# EAGLE board dashboard (EAGLE 6.3)
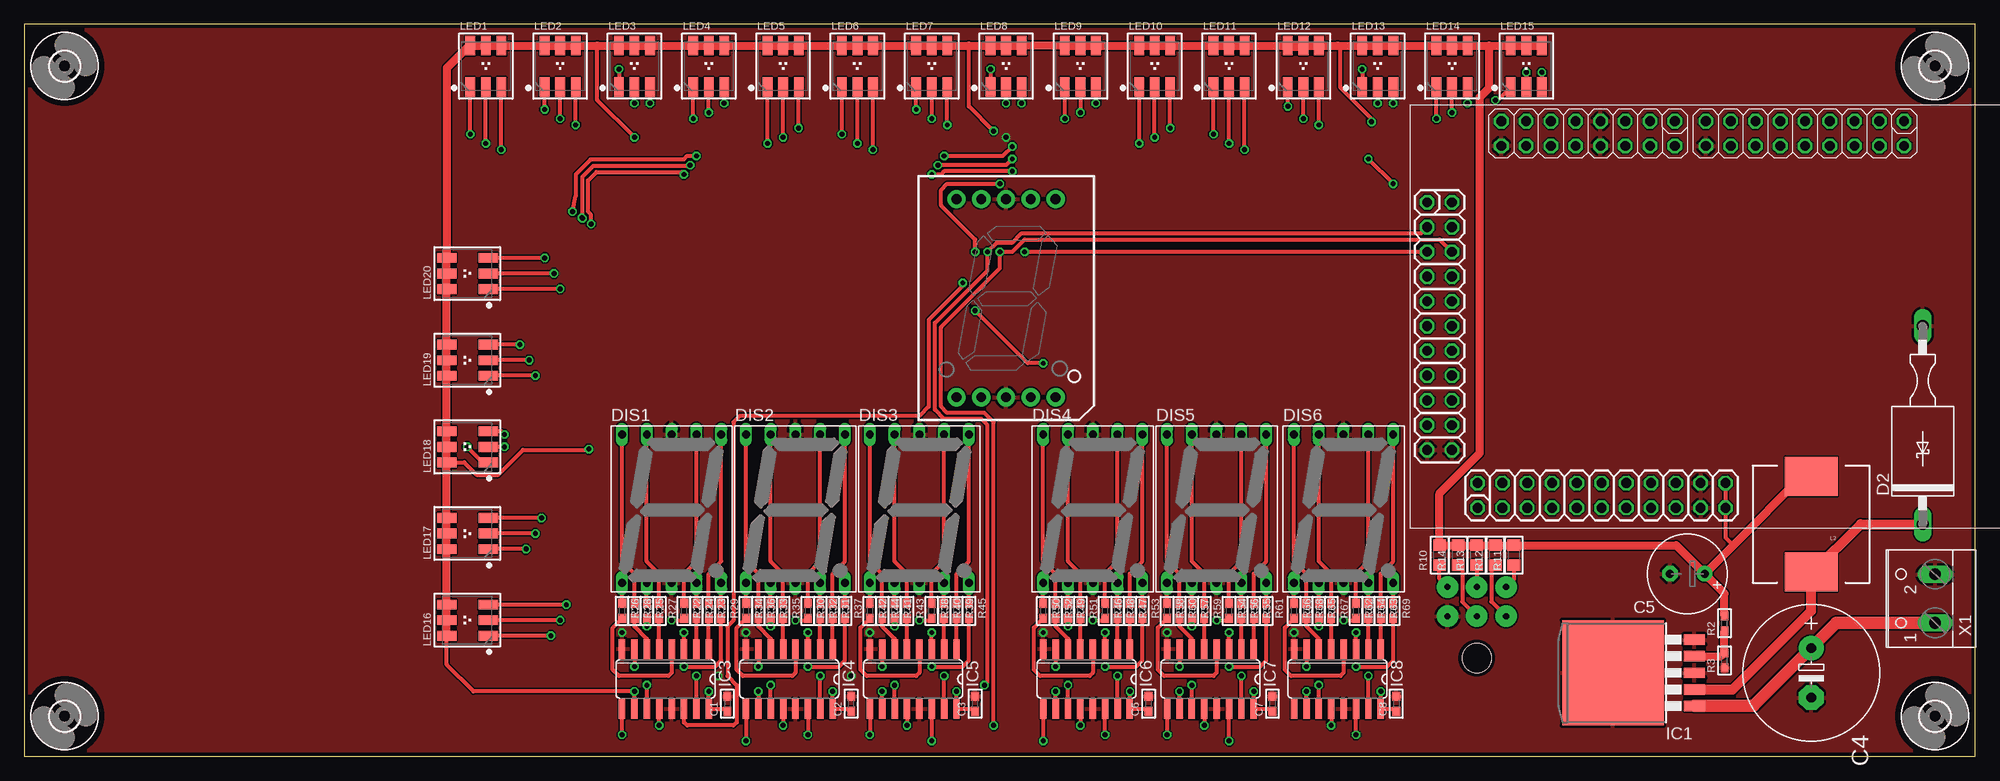
[diagram p0: board, top side]
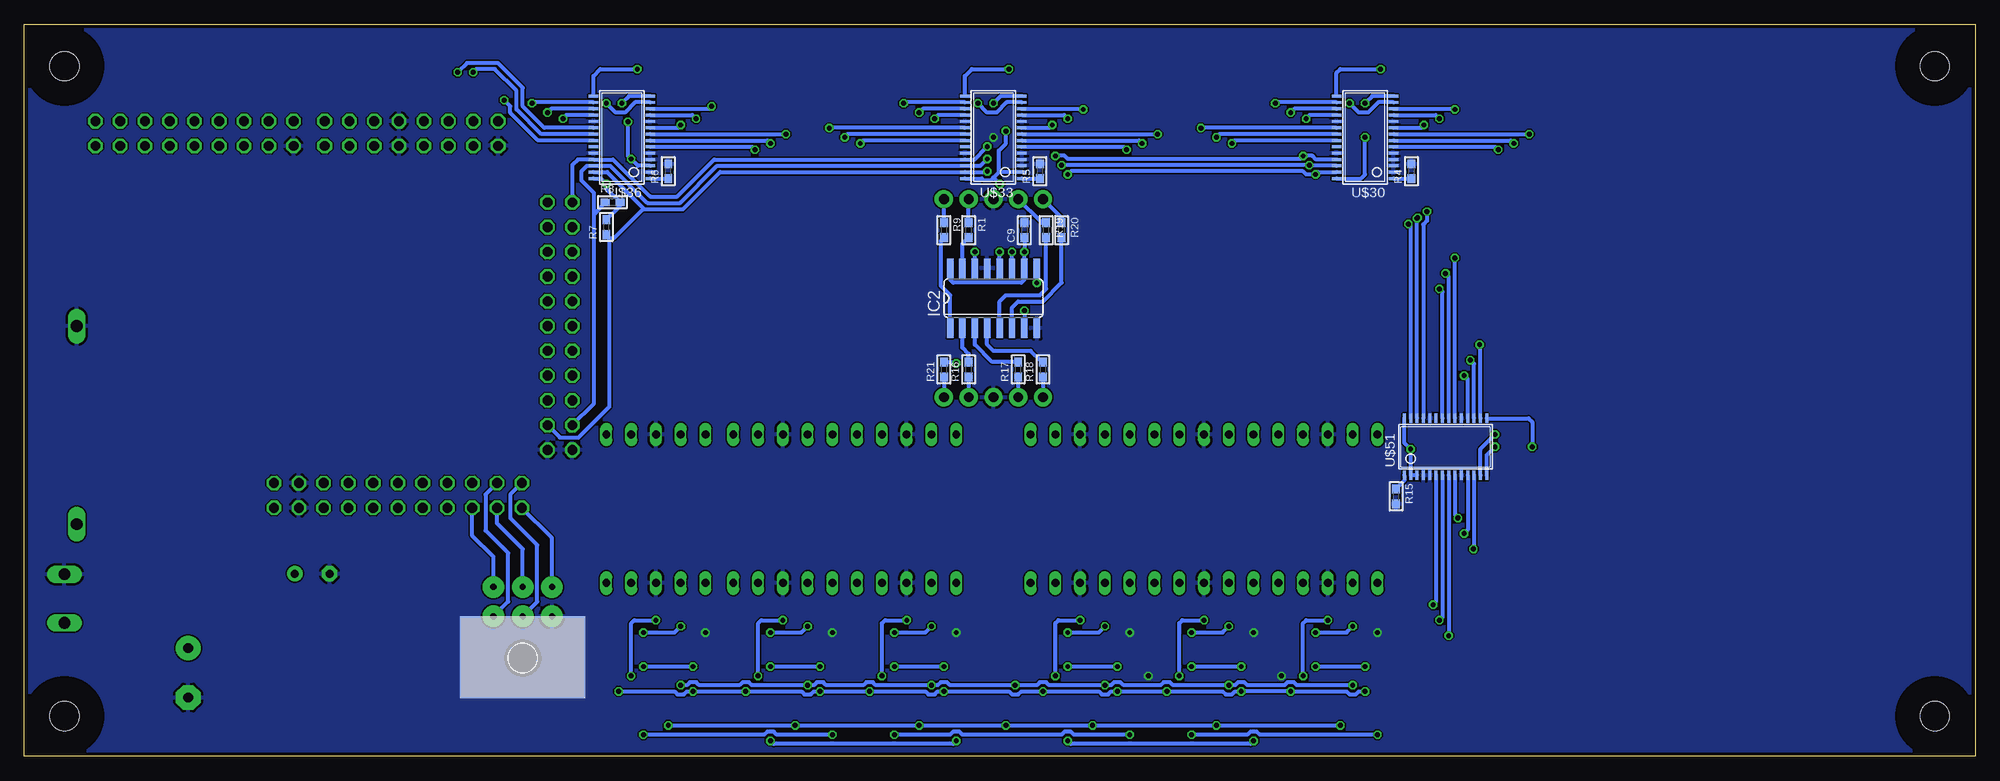
[diagram p1: board, bottom side, seen from below]

Size 200 x 75.08 mm. Coordinates in mm from the lower left corner, seen from the top.
Outline: 0,0 200,0 200,75.08 0,75.08 0,0
Copper layers (1*16): Top 0.0356mm / dielectric 1.5011mm / Bottom 0.0356mm
Design rules "LaenPCBOrder": minimum track width 6mil, minimum drill 13mil, track to track 6mil, track to pad 6mil, pad to pad 6mil, via to via 6mil, smd to smd 6mil, copper to edge 15mil, drill to drill 6mil, minimum pad ring 7mil, minimum via ring 7mil, stop-mask expansion 3mil, vias tented up to drill 0mil, thermal gap 10mil

## Footprints (pad centres in the part's own frame; a part is rotated, then mirrored left to right if it is on the bottom)
_0603 = smd 0.9 x 0.8: 1 -0.762,0; 2 0.762,0
E5-13 = drill 1.016 pad 2.54: + -2.54,0 | drill 1.016 pad 2.54 octagon: - 2.54,0
E3,5-8 = drill 0.813 pad 1.6: + -1.778,0 | drill 0.813 pad 1.6 octagon: - 1.778,0
DO13M = drill 1.194 long: A 10.16,0; C -10.16,0
HDSP-M = drill 0.813 long: 1 -5.08,-7.62; 2 -2.54,-7.62; 3 0,-7.62; 4 2.54,-7.62; 5 5.08,-7.62; 6 5.08,7.62; 7 2.54,7.62; 8 0,7.62; 9 -2.54,7.62; 10 -5.08,7.62
3,0 = hole 3: 0,0
TO263-5 = smd 1.067 x 2.159: 1 -3.404,-5.791; 2 -1.702,-5.791; 3 0,-5.791; 4 1.702,-5.791; 5 3.404,-5.791 | smd 10.8 x 10.41: 6 0,2.54
SO16 = smd 0.66 x 2.032: 1 -4.445,-3.073; 2 -3.175,-3.073; 3 -1.905,-3.073; 4 -0.635,-3.073; 5 0.635,-3.073; 6 1.905,-3.073; 7 3.175,-3.073; 8 4.445,-3.073; 9 4.445,3.073; 10 3.175,3.073; 11 1.905,3.073; 12 0.635,3.073; 13 -0.635,3.073; 14 -1.905,3.073; 15 -3.175,3.073; 16 -4.445,3.073
CDRH125 = smd 5.4 x 4: 1 0,4.9; 2 0,-4.9
RGBLED_PLCC6 = smd 1 x 2: 1 -1.6,-2.158; 2 0,-2.158; 3 1.6,-2.158; 4 1.6,2.108; 5 0,2.108; 6 -1.6,2.108
_0805 = smd 1.2 x 1.3: 1 -1.016,0; 2 1.016,0
CPU-BOARD-JP1 = drill 1 octagon: P$1 1.27,-12.7; P$2 -1.27,-12.7; P$3 1.27,-10.16; P$4 -1.27,-10.16; P$5 1.27,-7.62; P$6 -1.27,-7.62; P$7 1.27,-5.08; P$8 -1.27,-5.08; P$9 1.27,-2.54; P$10 -1.27,-2.54; P$11 1.27,0; P$12 -1.27,0; P$13 1.27,2.54; P$14 -1.27,2.54; P$15 1.27,5.08; P$16 -1.27,5.08; P$17 1.27,7.62; P$18 -1.27,7.62; P$19 1.27,10.16; P$20 -1.27,10.16; P$21 1.27,12.7; P$22 -1.27,12.7; P$23 -3.905,18.637; P$24 -3.905,16.097; P$25 -6.445,18.637; P$26 -6.445,16.097; P$27 -8.985,18.637; P$28 -8.985,16.097; P$29 -11.525,18.637; P$30 -11.525,16.097; P$31 -14.065,18.637; P$32 -14.065,16.097; P$33 -16.605,18.637; P$34 -16.605,16.097; P$35 -19.145,18.637; P$36 -19.145,16.097; P$37 -21.685,18.637; P$38 -21.685,16.097; P$39 -24.225,18.637; P$40 -24.225,16.097; P$41 -26.765,18.637; P$42 -26.765,16.097; P$43 -29.305,18.637; P$44 -29.305,16.097; P$45 -47.625,-21.018; P$46 -47.625,-18.479; P$47 -45.085,-21.018; P$48 -45.085,-18.479; P$49 -42.545,-21.018; P$50 -42.545,-18.479; P$51 -40.005,-21.018; P$52 -40.005,-18.479; P$53 -37.465,-21.018; P$54 -37.465,-18.479; P$55 -34.925,-21.018; P$56 -34.925,-18.479; P$57 -32.385,-21.018; P$58 -32.385,-18.479; P$59 -29.845,-21.018; P$60 -29.845,-18.479; P$61 -27.305,-21.018; P$62 -27.305,-18.479; P$63 -24.115,-21.024; P$64 -24.115,-18.484; P$65 -21.575,-21.024; P$66 -21.575,-18.484; P$67 -19.035,-21.024; P$68 -19.035,-18.484; P$69 -16.495,-21.024; P$70 -16.495,-18.484; P$71 -13.955,-21.024; P$72 -13.955,-18.484; P$73 -11.415,-21.024; P$74 -11.415,-18.484; P$75 -8.875,-21.024; P$76 -8.875,-18.484; P$77 -6.335,-21.024; P$78 -6.335,-18.484
7-SEGMENT-1"PTH = drill 1 pad 1.88: 1 -5.08,-10.16; 2 -2.54,-10.16; 3 0,-10.16; 4 2.54,-10.16; 5 5.08,-10.16; 6 5.08,10.16; 7 2.54,10.16; 8 0,10.16; 9 -2.54,10.16; 10 -5.08,10.16
TSSOP28 = smd 0.305 x 0.991: 1 -4.225,-2.918; 2 -3.575,-2.918; 3 -2.925,-2.918; 4 -2.275,-2.918; 5 -1.625,-2.918; 6 -0.975,-2.918; 7 -0.325,-2.918; 8 0.325,-2.918; 9 0.975,-2.918; 10 1.625,-2.918; 11 2.275,-2.918; 12 2.925,-2.918; 13 3.575,-2.918; 14 4.225,-2.918; 15 4.225,2.918; 16 3.575,2.918; 17 2.925,2.918; 18 2.275,2.918; 19 1.625,2.918; 20 0.975,2.918; 21 0.325,2.918; 22 -0.325,2.918; 23 -0.975,2.918; 24 -1.625,2.918; 25 -2.275,2.918; 26 -2.925,2.918; 27 -3.575,2.918; 28 -4.225,2.918
MICROFIT6SOCK = drill 0.64 pad 2.184: PIN1 3,-1.5; PIN2 3,1.5; PIN3 0,-1.5; PIN4 0,1.5; PIN5 -3,-1.5; PIN6 -3,1.5 | hole 3: 0,-5.8
W237-102 = drill 1.194 long: 1 -2.5,-1.27; 2 2.5,-1.27

## Placement (x,y rotation side)
C1  100n  [_0603]  72.07,5.4 90 top
C2  100n  [_0603]  84.77,5.4 90 top
C3  100n  [_0603]  97.47,5.4 90 top
C4  470u 50V  [E5-13]  183.2,8.57 270 top
C5  220u 35V  [E3,5-8]  170.5,18.73 180 top
C6  100n  [_0603]  115.25,5.4 90 top
C7  100n  [_0603]  127.95,5.4 90 top
C8  100n  [_0603]  140.65,5.4 90 top
C9  100n  [_0603]  97.47,53.98 90 bottom
D2  1N5638  [DO13M]  194.63,33.97 90 top
DIS1  HD-H103  [HDSP-M]  66.36,25.4 0 top
DIS2  HD-H103  [HDSP-M]  79.06,25.4 0 top
DIS3  HD-H103  [HDSP-M]  91.76,25.4 0 top
DIS4  HD-H103  [HDSP-M]  109.54,25.4 0 top
DIS5  HD-H103  [HDSP-M]  122.24,25.4 0 top
DIS6  HD-H103  [HDSP-M]  135.25,25.4 0 top
H1  MOUNT-HOLE3.0  [3,0]  4.13,4.13 0 top
H2  MOUNT-HOLE3.0  [3,0]  195.9,4.13 0 top
H3  MOUNT-HOLE3.0  [3,0]  195.9,70.8 0 top
H4  MOUNT-HOLE3.0  [3,0]  4.13,70.8 0 top
IC1  [TO263-5]  165.42,8.57 90 top
IC2  74HC595D  [SO16]  100.65,46.99 0 bottom
IC3  74HC595D  [SO16]  65.72,7.94 180 top
IC4  74HC595D  [SO16]  78.42,7.94 180 top
IC5  74HC595D  [SO16]  91.12,7.94 180 top
IC6  74HC595D  [SO16]  108.9,7.94 180 top
IC7  74HC595D  [SO16]  121.6,7.94 180 top
IC8  74HC595D  [SO16]  134.62,7.94 180 top
L2  MSS1583-683MED  [CDRH125]  183.2,23.81 180 top
LED1  [RGBLED_PLCC6]  47.31,70.8 0 top
LED2  [RGBLED_PLCC6]  54.93,70.8 0 top
LED3  [RGBLED_PLCC6]  62.55,70.8 0 top
LED4  [RGBLED_PLCC6]  70.17,70.8 0 top
LED5  [RGBLED_PLCC6]  77.79,70.8 0 top
LED6  [RGBLED_PLCC6]  85.41,70.8 0 top
LED7  [RGBLED_PLCC6]  93.03,70.8 0 top
LED8  [RGBLED_PLCC6]  100.65,70.8 0 top
LED9  [RGBLED_PLCC6]  108.27,70.8 0 top
LED10  [RGBLED_PLCC6]  115.89,70.8 0 top
LED11  [RGBLED_PLCC6]  123.51,70.8 0 top
LED12  [RGBLED_PLCC6]  131.13,70.8 0 top
LED13  [RGBLED_PLCC6]  138.75,70.8 0 top
LED14  [RGBLED_PLCC6]  146.37,70.8 0 top
LED15  [RGBLED_PLCC6]  153.99,70.8 0 top
LED16  [RGBLED_PLCC6]  45.4,13.97 90 top
LED17  [RGBLED_PLCC6]  45.4,22.86 90 top
LED18  [RGBLED_PLCC6]  45.4,31.75 90 top
LED19  [RGBLED_PLCC6]  45.4,40.64 90 top
LED20  [RGBLED_PLCC6]  45.4,49.53 90 top
R1  4R7  [_0603]  103.19,53.98 270 bottom
R2  1k69  [_0603]  174.31,13.65 90 top
R3  1k  [_0603]  174.31,9.84 90 top
R4  931  [_0603]  57.79,60.01 90 bottom
R5  931  [_0603]  95.88,60.01 90 bottom
R6  931  [_0603]  133.98,60.01 90 bottom
R7  500  [_0603]  140.34,54.29 90 bottom
R8  500  [_0603]  139.7,56.83 0 bottom
R9  4R7  [_0603]  105.73,53.98 270 bottom
R10  500  [_0805]  145.1,20.64 90 top
R11  500  [_0805]  152.72,20.64 90 top
R12  500  [_0805]  150.81,20.64 90 top
R13  500  [_0805]  148.91,20.64 90 top
R14  500  [_0805]  147,20.64 90 top
R15  931  [_0603]  59.37,26.67 270 bottom
R16  4R7  [_0603]  103.19,39.69 90 bottom
R17  4R7  [_0603]  98.11,39.69 90 bottom
R18  4R7  [_0603]  95.57,39.69 90 bottom
R19  4R7  [_0603]  95.25,53.98 270 bottom
R20  4R7  [_0603]  93.66,53.98 270 bottom
R21  4R7  [_0603]  105.73,39.69 90 bottom
R22  4R7  [_0603]  67.63,14.92 270 top
R23  4R7  [_0603]  70.17,14.92 270 top
R24  4R7  [_0603]  68.9,14.92 270 top
R25  4R7  [_0603]  63.82,14.92 270 top
R26  4R7  [_0603]  61.28,14.92 270 top
R27  4R7  [_0603]  65.09,14.92 270 top
R28  4R7  [_0603]  62.55,14.92 270 top
R29  4R7  [_0603]  71.44,14.92 270 top
R30  4R7  [_0603]  80.33,14.92 270 top
R31  4R7  [_0603]  82.87,14.92 270 top
R32  4R7  [_0603]  81.6,14.92 270 top
R33  4R7  [_0603]  76.52,14.92 270 top
R34  4R7  [_0603]  73.98,14.92 270 top
R35  4R7  [_0603]  77.79,14.92 270 top
R36  4R7  [_0603]  75.25,14.92 270 top
R37  4R7  [_0603]  84.14,14.92 270 top
R38  4R7  [_0603]  93.03,14.92 270 top
R39  4R7  [_0603]  95.57,14.92 270 top
R40  4R7  [_0603]  94.3,14.92 270 top
R41  4R7  [_0603]  89.22,14.92 270 top
R42  4R7  [_0603]  86.68,14.92 270 top
R43  4R7  [_0603]  90.49,14.92 270 top
R44  4R7  [_0603]  87.95,14.92 270 top
R45  4R7  [_0603]  96.84,14.92 270 top
R46  4R7  [_0603]  110.81,14.92 270 top
R47  4R7  [_0603]  113.35,14.92 270 top
R48  4R7  [_0603]  112.08,14.92 270 top
R49  4R7  [_0603]  107,14.92 270 top
R50  4R7  [_0603]  104.46,14.92 270 top
R51  4R7  [_0603]  108.27,14.92 270 top
R52  4R7  [_0603]  105.73,14.92 270 top
R53  4R7  [_0603]  114.62,14.92 270 top
R54  4R7  [_0603]  123.51,14.92 270 top
R55  4R7  [_0603]  126.05,14.92 270 top
R56  4R7  [_0603]  124.78,14.92 270 top
R57  4R7  [_0603]  119.7,14.92 270 top
R58  4R7  [_0603]  117.16,14.92 270 top
R59  4R7  [_0603]  120.97,14.92 270 top
R60  4R7  [_0603]  118.43,14.92 270 top
R61  4R7  [_0603]  127.32,14.92 270 top
R62  4R7  [_0603]  136.53,14.92 270 top
R63  4R7  [_0603]  139.06,14.92 270 top
R64  4R7  [_0603]  137.79,14.92 270 top
R65  4R7  [_0603]  132.72,14.92 270 top
R66  4R7  [_0603]  130.17,14.92 270 top
R67  4R7  [_0603]  133.98,14.92 270 top
R68  4R7  [_0603]  131.44,14.92 270 top
R69  4R7  [_0603]  140.34,14.92 270 top
U$1  CPU-BOARD  [CPU-BOARD-JP1]  145.1,44.13 180 top
U$9  7-SEGMENT-DISPLAY-1"-RED  [7-SEGMENT-1"PTH]  100.65,46.99 0 top
U$30  TLC59116  [TSSOP28]  62.55,63.5 90 bottom
U$33  TLC59116  [TSSOP28]  100.65,63.5 90 bottom
U$36  TLC59116  [TSSOP28]  138.75,63.5 90 bottom
U$42  MICROFIT6  [MICROFIT6SOCK]  148.91,15.88 0 bottom
U$51  TLC59116  [TSSOP28]  54.29,31.75 0 bottom
X1  [W237-102]  194.63,16.19 90 top

## Library data of the parts
C1-C3 C6-C9 LED1-LED20 R1-R69 = microbuilder
C4 C5 = rcl
D2 = diode
DIS1-DIS6 = display-hp; OC_FARNELL: unknown; OC_NEWARK: unknown
H1-H4 = holes
IC1 = linear
IC2-IC8 = 74xx-eu
L2 = SparkFun-Passives
U$1 = unicorn_v2
U$9 = SparkFun-Displays
U$30 U$33 U$36 U$51 = tlc
U$42 = unicorn
X1 = con-wago-500; MPN: 237-102; OC_FARNELL: unknown; OC_NEWARK: 70K9898

## Nets
3.3V: C1.1 C2.1 C3.1 C5.+ C6.1 C7.1 C8.1 C9.1 IC2.10 IC2.16 IC3.10 IC3.16 IC4.10 IC4.16 IC5.10 IC5.16 IC6.10 IC6.16 IC7.10 IC7.16 IC8.10 IC8.16 L2.2 LED1.4 LED1.5 LED1.6 LED2.4 LED2.5 LED2.6 LED3.4 LED3.5 LED3.6 LED4.4 LED4.5 LED4.6 LED5.4 LED5.5 LED5.6 LED6.4 LED6.5 LED6.6 LED7.4 LED7.5 LED7.6 LED8.4 LED8.5 LED8.6 LED9.4 LED9.5 LED9.6 LED10.4 LED10.5 LED10.6 LED11.4 LED11.5 LED11.6 LED12.4 LED12.5 LED12.6 LED13.4 LED13.5 LED13.6 LED14.4 LED14.5 LED14.6 LED15.4 LED15.5 LED15.6 LED16.4 LED16.5 LED16.6 LED17.4 LED17.5 LED17.6 LED18.4 LED18.5 LED18.6 LED19.4 LED19.5 LED19.6 LED20.4 LED20.5 LED20.6 R2.2 R7.2 R8.2 R10.2 R11.2 R12.2 R13.2 R14.2 U$1.P$43 U$1.P$44 U$30.28 U$33.2 U$33.28 U$36.3 U$36.28 U$51.2 U$51.3 U$51.28
12V: C4.+ IC1.1 X1.1
BTN1: R10.1 U$1.P$23 U$42.PIN2
BTN2: R14.1 U$1.P$24 U$42.PIN3
BTN3: R13.1 U$1.P$25 U$42.PIN4
BTN4: R12.1 U$1.P$26 U$42.PIN5
BTN5: R11.1 U$1.P$27 U$42.PIN6
GND: C1.2 C2.2 C3.2 C4.- C5.- C6.2 C7.2 C8.2 C9.2 D2.A DIS1.3 DIS1.8 DIS2.3 DIS2.8 DIS3.3 DIS3.8 DIS4.3 DIS4.8 DIS5.3 DIS5.8 DIS6.3 DIS6.8 IC1.3 IC1.5 IC1.6 IC2.8 IC2.13 IC3.8 IC3.13 IC4.8 IC4.13 IC5.8 IC5.13 IC6.8 IC6.13 IC7.8 IC7.13 IC8.8 IC8.13 R3.1 R4.2 R5.2 R6.2 R15.2 U$1.P$21 U$1.P$22 U$1.P$41 U$1.P$42 U$1.P$62 U$1.P$69 U$1.P$70 U$1.P$78 U$9.3 U$9.8 U$30.2 U$30.3 U$30.4 U$30.5 U$30.10 U$30.19 U$30.24 U$33.3 U$33.4 U$33.5 U$33.10 U$33.19 U$33.24 U$36.2 U$36.4 U$36.5 U$36.10 U$36.19 U$36.24 U$42.PIN1 U$51.4 U$51.5 U$51.10 U$51.19 U$51.24 X1.2
LATCH: IC2.12 IC3.12 IC4.12 IC5.12 IC6.12 IC7.12 IC8.12 U$1.P$6
MOSI: IC2.14 U$1.P$5
N$1: IC2.15 R1.2
N$2: IC2.1 R9.2
N$3: IC2.2 R16.2
N$4: IC2.3 R17.2
N$5: IC2.4 R18.2
N$6: IC1.4 R2.1 R3.2
N$7: LED1.3 U$30.6
N$8: LED1.2 U$30.7
N$9: D2.C IC1.2 L2.1
N$10: LED1.1 U$30.8
N$11: LED2.3 U$30.9
N$12: LED2.2 U$30.11
N$13: LED2.1 U$30.12
N$14: LED3.3 U$30.13
N$15: LED3.2 U$30.14
N$16: LED3.1 U$30.15
N$17: LED4.3 U$30.16
N$18: LED4.2 U$30.17
N$19: LED4.1 U$30.18
N$20: LED5.3 U$30.20
N$21: LED5.2 U$30.21
N$22: LED5.1 U$30.22
N$23: LED6.3 U$33.6
N$24: LED6.2 U$33.7
N$25: LED6.1 U$33.8
N$26: LED7.3 U$33.9
N$27: LED7.2 U$33.11
N$28: LED7.1 U$33.12
N$29: LED8.3 U$33.13
N$30: LED8.2 U$33.14
N$31: LED8.1 U$33.15
N$32: LED9.3 U$33.16
N$33: LED9.2 U$33.17
N$34: LED9.1 U$33.18
N$35: LED10.3 U$33.20
N$36: LED10.2 U$33.21
N$37: LED10.1 U$33.22
N$38: LED11.3 U$36.6
N$39: LED11.2 U$36.7
N$40: LED11.1 U$36.8
N$41: LED12.3 U$36.9
N$42: LED12.2 U$36.11
N$43: LED12.1 U$36.12
N$44: LED13.3 U$36.13
N$45: LED13.2 U$36.14
N$46: LED13.1 U$36.15
N$47: LED14.3 U$36.16
N$48: LED14.2 U$36.17
N$49: LED14.1 U$36.18
N$50: LED15.3 U$36.20
N$51: LED15.2 U$36.21
N$52: LED15.1 U$36.22
N$53: R4.1 U$30.1
N$54: LED16.3 U$51.6
N$55: R5.1 U$33.1
N$56: R6.1 U$36.1
N$57: IC2.5 R19.2
N$58: IC2.6 R20.2
N$59: R1.1 U$9.7
N$60: R9.1 U$9.6
N$61: R16.1 U$9.4
N$62: LED16.2 U$51.7
N$63: LED16.1 U$51.8
N$64: LED17.3 U$51.9
N$65: LED17.2 U$51.11
N$66: LED17.1 U$51.12
N$67: LED18.3 U$51.13
N$68: LED18.2 U$51.14
N$69: LED18.1 U$51.15
N$70: LED19.3 U$51.16
N$71: LED19.2 U$51.17
N$72: LED19.1 U$51.18
N$73: LED20.3 U$51.20
N$74: LED20.2 U$51.21
N$75: LED20.1 U$51.22
N$76: R15.1 U$51.1
N$77: R17.1 U$9.2
N$79: R18.1 U$9.1
N$80: R19.1 U$9.9
N$81: R20.1 U$9.10
N$82: R21.1 U$9.5
N$83: IC2.7 R21.2
N$84: IC3.15 R22.2
N$85: IC3.1 R23.2
N$86: IC3.2 R24.2
N$87: IC3.3 R25.2
N$88: IC3.4 R26.2
N$89: IC3.5 R27.2
N$90: IC3.6 R28.2
N$91: IC3.7 R29.2
N$92: DIS1.7 R22.1
N$93: DIS1.6 R23.1
N$94: DIS1.4 R24.1
N$95: DIS1.2 R25.1
N$96: DIS1.1 R26.1
N$97: DIS1.9 R27.1
N$98: DIS1.10 R28.1
N$99: IC4.15 R30.2
N$100: IC4.1 R31.2
N$101: IC4.2 R32.2
N$102: IC4.3 R33.2
N$103: IC4.4 R34.2
N$104: IC4.5 R35.2
N$105: IC4.6 R36.2
N$106: IC4.7 R37.2
N$107: DIS2.7 R30.1
N$108: DIS2.6 R31.1
N$109: DIS2.4 R32.1
N$110: DIS2.2 R33.1
N$111: DIS2.1 R34.1
N$112: DIS2.9 R35.1
N$113: DIS2.10 R36.1
N$114: DIS3.7 R38.1
N$115: DIS3.6 R39.1
N$116: DIS3.4 R40.1
N$117: DIS3.2 R41.1
N$118: DIS3.1 R42.1
N$119: DIS3.9 R43.1
N$120: DIS3.10 R44.1
N$121: IC5.15 R38.2
N$122: IC5.1 R39.2
N$123: IC5.2 R40.2
N$124: IC5.3 R41.2
N$125: IC5.4 R42.2
N$126: IC5.5 R43.2
N$127: IC5.6 R44.2
N$128: IC5.7 R45.2
N$129: IC6.15 R46.2
N$130: IC6.1 R47.2
N$131: IC6.2 R48.2
N$132: IC6.3 R49.2
N$133: IC6.4 R50.2
N$134: IC6.5 R51.2
N$135: IC6.6 R52.2
N$136: IC6.7 R53.2
N$137: DIS4.7 R46.1
N$138: DIS4.6 R47.1
N$139: DIS4.4 R48.1
N$140: DIS4.2 R49.1
N$141: DIS4.1 R50.1
N$142: DIS4.9 R51.1
N$143: DIS4.10 R52.1
N$144: IC7.15 R54.2
N$145: IC7.1 R55.2
N$146: IC7.2 R56.2
N$147: IC7.3 R57.2
N$148: IC7.4 R58.2
N$149: IC7.5 R59.2
N$150: IC7.6 R60.2
N$151: IC7.7 R61.2
N$152: DIS5.7 R54.1
N$153: DIS5.6 R55.1
N$154: DIS5.4 R56.1
N$155: DIS5.2 R57.1
N$156: DIS5.1 R58.1
N$157: DIS5.9 R59.1
N$158: DIS5.10 R60.1
N$159: IC8.15 R62.2
N$160: IC8.1 R63.2
N$161: IC8.2 R64.2
N$162: IC8.3 R65.2
N$163: IC8.4 R66.2
N$164: IC8.5 R67.2
N$165: IC8.6 R68.2
N$166: IC8.7 R69.2
N$167: DIS6.7 R62.1
N$168: DIS6.6 R63.1
N$169: DIS6.4 R64.1
N$170: DIS6.2 R65.1
N$171: DIS6.1 R66.1
N$172: DIS6.9 R67.1
N$173: DIS6.10 R68.1
N$174: IC2.9 IC3.14
N$175: DIS1.5 R29.1
N$176: DIS2.5 R37.1
N$177: DIS3.5 R45.1
N$178: DIS4.5 R53.1
N$179: DIS5.5 R61.1
N$180: DIS6.5 R69.1
N$181: IC3.9 IC4.14
N$182: IC4.9 IC5.14
N$183: IC5.9 IC6.14
N$184: IC6.9 IC7.14
N$185: IC7.9 IC8.14
SCK: IC2.11 IC3.11 IC4.11 IC5.11 IC6.11 IC7.11 IC8.11 U$1.P$3
SCL: R8.1 U$1.P$19 U$30.26 U$33.26 U$36.26 U$51.26
SDA: R7.1 U$1.P$20 U$30.27 U$33.27 U$36.27 U$51.27
~RESET: U$1.P$1 U$30.25 U$33.25 U$36.25 U$51.25

## Tracks (layer width: path | path; a pad name or v marks a point on that pad's centre or on a via)
3.3V  (via drill 0.5)
  Top 0.406: U$1.P$44 U$1.P$43 174.4,22.45 175.2,21.65 | 174.4,20.86 C5.+ | v62.55,63.5 58.74,67.31 58.74,72.91 | v138.11,65.09 138.11,65.41 134.94,68.58 134.94,72.59 134.62,72.91 | v140.34,58.74 v137.79,61.28 | R10.2 R14.2 R13.2 R12.2 R11.2 | LED18.6 45.1,30.15 46.36,28.89 48.58,28.89 51.12,31.43 57.79,31.43 v57.87,31.51 | v99.38,64.13 96.84,66.67 96.84,72.91 | IC3.10 v62.55,6.67 46.04,6.67 43.29,9.41 LED16.6 | v75.25,6.67 IC4.10 | IC5.10 v87.95,6.67 | IC6.10 v105.73,6.67 | IC7.10 v118.43,6.67 | IC8.10 v131.44,6.67 | v97.47,51.75 97.47,53.02 93.98,56.51 93.98,58.1 94.61,58.74 v100.01,58.74 | v70.17,6.67 IC3.16 71.84,4.86 C1.1 | v82.87,6.67 IC4.16 84.54,4.86 C2.1 | v95.57,6.67 IC5.16 97.24,4.86 C3.1 | v113.35,6.67 IC6.16 115.02,4.86 C6.1 | v126.05,6.67 IC7.16 127.72,4.86 C7.1 | v139.07,6.67 IC8.16 140.42,4.86 C8.1
  Top 0.813: L2.2 182.26,28.71 175.2,21.65 C5.+ | R2.2 174.31,16.7 C5.+ | LED12.6 LED11.4 LED11.5 LED11.6 LED10.4 LED10.5 LED10.6 LED9.4 LED9.5 LED9.6 LED8.4 LED8.5 LED8.6 96.84,72.91 LED7.4 LED7.5 LED7.6 LED6.4 LED6.5 LED6.6 LED5.4 LED5.5 LED5.6 LED4.4 LED4.5 LED4.6 LED3.4 LED3.5 LED3.6 58.74,72.91 LED2.4 LED2.5 LED2.6 LED1.4 LED1.5 LED1.6 45.61,72.91 43.29,70.6 LED20.4 LED20.5 LED20.6 LED19.4 LED19.5 LED19.6 LED18.4 LED18.5 LED18.6 LED17.4 LED17.5 LED17.6 LED16.4 LED16.5 LED16.6 | LED12.5 LED12.4 134.62,72.91 LED13.6 LED13.5 LED13.4 LED14.6 LED14.5 LED14.4 150.18,72.91 | 150.18,72.91 LED15.6 LED15.5 LED15.4 | C5.+ 169.35,21.65 R10.2 145.1,26.99 149.22,31.12 149.22,67.63 150.18,68.58 150.18,72.91
  Top 1.016: LED12.6 LED12.5
  Bottom 0.406: U$33.2 100.1,59.92 | 100.1,59.92 100.65,59.37 | 100.65,59.37 100.96,59.05 101.6,59.05 101.82,59.27 U$33.28 | U$30.28 62.96,59.27 62.55,59.69 v62.55,63.5 | 138.18,65.02 v138.11,65.09 138.11,61.59 v137.79,61.28 137.09,60.58 U$36.3 | U$36.28 140.87,59.27 v140.34,58.74 140.34,58.23 R8.2 138.94,56.45 R7.2 | U$51.3 U$51.2 v57.87,31.51 58.52,32.16 U$51.28 | 100.1,59.92 100.1,62.15 99.38,62.87 v99.38,64.13 | v100.01,58.74 100.65,59.37 | IC2.16 105.09,48.9 104.77,48.58 97.79,48.58 97.47,48.9 IC2.10 v97.47,51.75 C9.1 | v62.55,6.67 63.18,6.67 63.5,6.35 64.14,6.35 64.45,6.67 v70.17,6.67 v75.25,6.67 75.88,6.67 76.2,6.35 76.83,6.35 77.15,6.67 v82.87,6.67 v87.95,6.67 88.58,6.67 88.9,6.35 89.54,6.35 89.85,6.67 v95.57,6.67 97.79,6.67 98.11,6.35 98.74,6.35 99.06,6.67 v105.73,6.67 106.36,6.67 106.68,6.35 107.32,6.35 107.63,6.67 v113.35,6.67 v118.43,6.67 119.06,6.67 119.38,6.35 120.02,6.35 120.33,6.67 v126.05,6.67 v131.44,6.67 132.08,6.67 132.4,6.35 133.03,6.35 133.35,6.67 v139.07,6.67
12V
  Top 1.27: X1.1 185.78,13.69 C4.+ 177.25,5.17 IC1.1
BTN1
  Top 0.406: U$42.PIN2 145.1,18.19 R10.1
  Bottom 0.406: U$42.PIN2 145.91,22.4 U$1.P$23
BTN2
  Top 0.406: R14.1 147.42,19.21 147.42,15.87 U$42.PIN3
  Bottom 0.406: U$1.P$24 150.18,26.86 150.18,24.45 147.42,21.69 147.42,15.87 U$42.PIN3
BTN3
  Top 0.406: R13.1 U$42.PIN4
  Bottom 0.406: U$42.PIN4 148.91,21.27 151.54,23.91 U$1.P$25
BTN4
  Top 0.406: R12.1 150.4,19.62 150.4,15.88 U$42.PIN5
  Bottom 0.406: U$1.P$26 152.72,26.86 152.72,23.18 150.4,20.86 150.4,15.88 U$42.PIN5
BTN5
  Top 0.406: R11.1 152.72,18.19 U$42.PIN6
  Bottom 0.406: U$42.PIN6 151.91,20.46 154.08,22.64 U$1.P$27
GND  (via drill 0.5)
  other vias: 100.65,63.5 61.28,12.7 73.98,12.7 86.68,12.7 104.46,12.7 117.16,12.7 130.17,12.7 71.12,8.26 84.77,8.26
  pour Top: 0.32,0 200.98,0 200.98,74.61 0.32,74.61
  pour Bottom: 0.32,0 200.98,0 200.98,74.61 0.32,74.61
LATCH  (via drill 0.5)
  Top 0.406: IC8.12 v133.98,3.18 | IC5.12 v90.49,3.18 | IC7.12 v120.97,3.18 | U$1.P$6 145.1,53.02 102.55,53.02 101.28,51.75 v100.01,51.75 IC2.12 93.98,44.03 93.98,35.88 94.61,35.24 98.43,35.24 99.38,34.29 v99.38,3.18 | IC6.12 v108.27,3.18 | IC4.12 v77.79,3.18 | v65.09,3.18 IC3.12
  Bottom 0.406: v133.98,3.18 v120.97,3.18 v108.27,3.18 v99.38,3.18 v90.49,3.18 v77.79,3.18 v65.09,3.18 | IC2.12 v100.01,51.75
MOSI  (via drill 0.5)
  Top 0.406: v102.55,51.75 U$1.P$5
  Bottom 0.406: IC2.14 v102.55,51.75
N$1
  Bottom 0.406: IC2.15 103.82,52.58 R1.2
N$2
  Bottom 0.406: IC2.1 105.09,47.31 106.05,48.26 106.05,52.9 R9.2
N$3
  Bottom 0.406: R16.2 103.19,41.27 103.82,41.91 IC2.2
N$4
  Bottom 0.406: R17.2 100.77,40.45 102.55,42.23 IC2.3
N$5
  Bottom 0.406: R18.2 95.69,40.45 96.84,41.59 100.65,41.59 101.28,42.23 IC2.4
N$6
  Top 0.813: IC1.4 173.98,10.27 R3.2 R2.1
N$7  (via drill 0.5)
  Top 0.406: v48.9,62.23 48.9,68.63 LED1.3
  Bottom 0.406: U$30.6 49.19,62.52 v48.9,62.23
N$8  (via drill 0.5)
  Top 0.406: v47.31,62.87 LED1.2
  Bottom 0.406: U$30.7 47.62,63.17 v47.31,62.87
N$9
  Top 1.016: IC1.2 175.15,6.87 183.2,14.92 L2.1 183.38,18.91 188.28,23.81 D2.C
N$10  (via drill 0.5)
  Top 0.406: v45.72,63.82 45.72,68.63 LED1.1
  Bottom 0.406: U$30.8 v45.73,63.83 v45.72,63.82
N$11  (via drill 0.5)
  Top 0.406: v56.51,64.77 56.51,68.63 LED2.3
  Bottom 0.406: U$30.9 56.81,64.48 v56.51,64.77
N$12  (via drill 0.5)
  Top 0.406: v54.93,65.41 LED2.2
  Bottom 0.406: U$30.11 55.3,65.78 v54.93,65.41
N$13  (via drill 0.5)
  Top 0.406: v53.34,66.36 53.34,68.63 LED2.1
  Bottom 0.406: U$30.12 53.41,66.42 v53.34,66.36
N$14  (via drill 0.5)
  Top 0.406: v64.14,66.99 64.14,68.63 LED3.3
  Bottom 0.406: U$30.13 61.19,67.08 62.23,66.04 63.18,66.04 v64.14,66.99
N$15  (via drill 0.5)
  Top 0.406: v62.55,66.99 LED3.2
  Bottom 0.406: U$30.14 61.82,67.72 v62.55,66.99
N$16  (via drill 0.5)
  Top 0.406: v60.96,70.48 60.96,68.66 LED3.1
  Bottom 0.406: U$30.15 65.47,70.11 65.09,70.48 v60.96,70.48
N$17  (via drill 0.5)
  Top 0.406: v71.76,66.99 71.76,68.63 LED4.3
  Bottom 0.406: U$30.16 71.52,67.08 v71.76,66.99
N$18  (via drill 0.5)
  Top 0.406: v70.17,66.04 LED4.2
  Bottom 0.406: U$30.17 69.78,66.42 v70.17,66.04
N$19  (via drill 0.5)
  Top 0.406: v68.58,65.41 68.58,68.63 LED4.1
  Bottom 0.406: U$30.18 68.21,65.78 v68.58,65.41
N$20  (via drill 0.5)
  Top 0.406: v79.38,64.45 79.38,68.63 LED5.3
  Bottom 0.406: U$30.20 79.35,64.48 v79.38,64.45
N$21  (via drill 0.5)
  Top 0.406: v77.79,63.5 LED5.2
  Bottom 0.406: U$30.21 77.46,63.83 v77.79,63.5
N$22  (via drill 0.5)
  Top 0.406: v76.2,62.87 76.2,68.63 LED5.1
  Bottom 0.406: U$30.22 75.89,63.17 v76.2,62.87
N$23  (via drill 0.5)
  Top 0.406: v86.99,62.23 86.99,68.63 LED6.3
  Bottom 0.406: U$33.6 87.29,62.52 v86.99,62.23
N$24  (via drill 0.5)
  Top 0.406: v85.41,62.87 LED6.2
  Bottom 0.406: U$33.7 85.72,63.17 v85.41,62.87
N$25  (via drill 0.5)
  Top 0.406: v83.82,63.82 83.82,68.63 LED6.1
  Bottom 0.406: U$33.8 v83.83,63.83 v83.82,63.82
N$26  (via drill 0.5)
  Top 0.406: v94.61,64.77 94.61,68.63 LED7.3
  Bottom 0.406: U$33.9 94.91,64.48 v94.61,64.77
N$27  (via drill 0.5)
  Top 0.406: LED7.2 v93.03,65.41
  Bottom 0.406: U$33.11 93.4,65.78 v93.03,65.41
N$28  (via drill 0.5)
  Top 0.406: v91.44,66.36 91.44,68.63 LED7.1
  Bottom 0.406: U$33.12 91.51,66.42 v91.44,66.36
N$29  (via drill 0.5)
  Top 0.406: v102.24,66.99 102.24,68.63 LED8.3
  Bottom 0.406: U$33.13 99.3,67.08 100.33,66.04 101.28,66.04 v102.24,66.99
N$30  (via drill 0.5)
  Top 0.406: v100.65,66.99 LED8.2
  Bottom 0.406: U$33.14 99.91,67.72 v100.65,66.99
N$31  (via drill 0.5)
  Top 0.406: v99.06,70.48 99.06,68.66 LED8.1
  Bottom 0.406: U$33.15 103.57,69.79 102.87,70.48 v99.06,70.48
N$32  (via drill 0.5)
  Top 0.406: v109.85,66.99 109.85,68.63 LED9.3
  Bottom 0.406: U$33.16 109.77,67.08 v109.85,66.99
N$33  (via drill 0.5)
  Top 0.406: LED9.2 v108.27,66.04
  Bottom 0.406: U$33.17 107.88,66.42 v108.27,66.04
N$34  (via drill 0.5)
  Top 0.406: v106.68,65.41 106.68,68.63 LED9.1
  Bottom 0.406: U$33.18 106.31,65.78 v106.68,65.41
N$35  (via drill 0.5)
  Top 0.406: v117.47,64.45 117.47,68.63 LED10.3
  Bottom 0.406: U$33.20 117.45,64.48 v117.47,64.45
N$36  (via drill 0.5)
  Top 0.406: v115.89,63.5 LED10.2
  Bottom 0.406: U$33.21 115.56,63.83 v115.89,63.5
N$37  (via drill 0.5)
  Top 0.406: v114.3,62.87 114.3,68.63 LED10.1
  Bottom 0.406: U$33.22 113.99,63.17 v114.3,62.87
N$38  (via drill 0.5)
  Top 0.406: v125.1,62.23 125.1,68.63 LED11.3
  Bottom 0.406: U$36.6 125.39,62.52 v125.1,62.23
N$39  (via drill 0.5)
  Top 0.406: v123.51,62.87 LED11.2
  Bottom 0.406: U$36.7 123.82,63.17 v123.51,62.87
N$40  (via drill 0.5)
  Top 0.406: v121.92,63.82 121.92,68.63 LED11.1
  Bottom 0.406: U$36.8 v121.93,63.83 v121.92,63.82
N$41  (via drill 0.5)
  Top 0.406: v132.72,64.77 132.72,68.63 LED12.3
  Bottom 0.406: U$36.9 133.01,64.48 v132.72,64.77
N$42  (via drill 0.5)
  Top 0.406: v131.13,65.41 LED12.2
  Bottom 0.406: U$36.11 131.5,65.78 v131.13,65.41
N$43  (via drill 0.5)
  Top 0.406: v129.54,66.67 129.54,68.63 LED12.1
  Bottom 0.406: U$36.12 129.79,66.42 v129.54,66.67
N$44  (via drill 0.5)
  Top 0.406: v140.34,66.99 140.34,68.63 LED13.3
  Bottom 0.406: U$36.13 137.39,67.08 138.43,66.04 139.38,66.04 v140.34,66.99
N$45  (via drill 0.5)
  Top 0.406: v138.75,66.99 LED13.2
  Bottom 0.406: U$36.14 138.01,67.72 v138.75,66.99
N$46  (via drill 0.5)
  Top 0.406: v137.16,70.48 137.16,68.66 LED13.1
  Bottom 0.406: U$36.15 141.67,69.79 140.97,70.48 v137.16,70.48
N$47  (via drill 0.5)
  Top 0.406: v147.95,66.99 147.95,68.63 LED14.3
  Bottom 0.406: U$36.16 147.72,67.08 v147.95,66.99
N$48  (via drill 0.5)
  Top 0.406: v146.37,66.04 LED14.2
  Bottom 0.406: U$36.17 145.98,66.42 v146.37,66.04
N$49  (via drill 0.5)
  Top 0.406: v144.78,65.41 144.78,68.63 LED14.1
  Bottom 0.406: U$36.18 144.41,65.78 v144.78,65.41
N$50  (via drill 0.5)
  Top 0.406: v155.57,70.17 155.57,68.66 LED15.3
  Bottom 0.406: U$36.20 146.71,64.48 148.91,66.67 148.91,68.58 151.45,71.12 154.62,71.12 v155.57,70.17
N$51  (via drill 0.5)
  Top 0.406: v153.99,70.17 LED15.2
  Bottom 0.406: U$36.21 147.01,63.83 149.54,66.36 149.54,68.26 151.76,70.48 153.67,70.48 v153.99,70.17
N$52  (via drill 0.5)
  Top 0.406: v150.81,67.31 151.05,67.31 LED15.1
  Bottom 0.406: U$36.22 147.31,63.17 150.18,66.04 150.18,66.67 v150.81,67.31
N$53
  Bottom 0.406: U$30.1 57.81,59.27 R4.1
N$54  (via drill 0.5)
  Top 0.406: v55.56,15.56 47.57,15.56 LED16.3
  Bottom 0.406: U$51.6 55.27,15.85 v55.56,15.56
N$55
  Bottom 0.406: U$33.1 95.91,59.27 R5.1
N$56
  Bottom 0.406: U$36.1 133.98,59.27 R6.1
N$57
  Bottom 0.406: IC2.5 100.01,46.67 99.38,47.31 95.88,47.31 95.25,47.94 R19.2
N$58
  Bottom 0.406: IC2.6 98.74,46.04 98.11,46.67 95.57,46.67 93.66,48.58 R20.2
N$59
  Bottom 0.406: R1.1 U$9.7
N$60
  Bottom 0.406: R9.1 U$9.6
N$61
  Bottom 0.406: R16.1 U$9.4
N$62  (via drill 0.5)
  Top 0.406: v54.93,13.97 LED16.2
  Bottom 0.406: U$51.7 54.62,14.28 v54.93,13.97
N$63  (via drill 0.5)
  Top 0.406: v53.97,12.38 47.57,12.38 LED16.1
  Bottom 0.406: U$51.8 v53.97,12.39 v53.97,12.38
N$64  (via drill 0.5)
  Top 0.406: v53.02,24.45 47.57,24.45 LED17.3
  Bottom 0.406: U$51.9 53.32,24.79 v53.02,24.45
N$65  (via drill 0.5)
  Top 0.406: v52.39,22.86 LED17.2
  Bottom 0.406: U$51.11 52.02,23.23 v52.39,22.86
N$66  (via drill 0.5)
  Top 0.406: v51.43,21.27 47.57,21.27 LED17.1
  Bottom 0.406: U$51.12 51.37,21.34 v51.43,21.27
N$67  (via drill 0.5)
  Top 0.406: v49.21,33.02 48.88,33.35 LED18.3
  Bottom 0.406: U$51.13 50.72,31.51 v49.21,33.02
N$68  (via drill 0.5)
  Top 0.406: v49.21,31.75 LED18.2
  Bottom 0.406: U$51.14 50.07,30.89 v49.21,31.75
N$69  (via drill 0.5)
  Top 0.406: v45.4,31.75 47,30.15 LED18.1
  Bottom 0.406: U$51.15 45.78,34.67 45.4,34.29 v45.4,31.75
N$70  (via drill 0.5)
  Top 0.406: v50.8,42.23 47.57,42.23 LED19.3
  Bottom 0.406: U$51.16 50.72,42.15 v50.8,42.23
N$71  (via drill 0.5)
  Top 0.406: v51.75,40.64 LED19.2
  Bottom 0.406: U$51.17 51.37,40.26 v51.75,40.64
N$72  (via drill 0.5)
  Top 0.406: v52.39,39.05 47.57,39.05 LED19.1
  Bottom 0.406: U$51.18 52.02,38.68 v52.39,39.05
N$73  (via drill 0.5)
  Top 0.406: v53.34,51.12 47.57,51.12 LED20.3
  Bottom 0.406: U$51.20 53.32,51.09 v53.34,51.12
N$74  (via drill 0.5)
  Top 0.406: v54.29,49.53 LED20.2
  Bottom 0.406: U$51.21 53.97,49.2 v54.29,49.53
N$75  (via drill 0.5)
  Top 0.406: v54.93,47.94 47.57,47.94 LED20.1
  Bottom 0.406: U$51.22 54.62,47.63 v54.93,47.94
N$76
  Bottom 0.406: U$51.1 58.52,28.29 R15.1
N$77
  Bottom 0.406: R17.1 U$9.2
N$79
  Bottom 0.406: R18.1 U$9.1
N$80
  Bottom 0.406: R19.1 95.69,54.74 U$9.9
N$81
  Bottom 0.406: R20.1 93.66,55.24 U$9.10
N$82
  Bottom 0.406: R21.1 U$9.5
N$83  (via drill 0.5)
  Top 0.406: v104.46,40.32 102.87,40.32 v97.47,45.72
  Bottom 0.406: R21.2 104.58,40.45 v104.46,40.32 | v97.47,45.72 IC2.7
N$84  (via drill 0.5)
  Top 0.406: IC3.15 v68.9,8.26 | v66.36,13.97 67.44,13.97 R22.2
  Bottom 0.406: v68.9,8.26 68.9,13.65 68.58,13.97 v66.36,13.97
N$85
  Top 0.406: IC3.1 R23.2
N$86
  Top 0.406: IC3.2 R24.2
N$87  (via drill 0.5)
  Top 0.406: IC3.3 v67.63,12.7 | v63.82,13.34 R25.2
  Bottom 0.406: v67.63,12.7 64.45,12.7 v63.82,13.34
N$88
  Top 0.406: IC3.4 66.36,8.57 66.04,8.26 60.96,8.26 60.33,8.89 60.33,13.21 R26.2
N$89
  Top 0.406: IC3.5 R27.2
N$90
  Top 0.406: IC3.6 63.82,12.07 62.55,13.34 R28.2
N$91  (via drill 0.5)
  Top 0.406: IC3.7 v62.55,9.21 | v67.63,9.21 70.8,9.21 71.44,9.84 R29.2
  Bottom 0.406: v62.55,9.21 v67.63,9.21
N$92
  Top 0.406: R22.1 67.63,18.73 68.9,20 DIS1.7
N$93
  Top 0.406: R23.1 70.17,18.73 71.44,20 DIS1.6
N$94
  Top 0.406: R24.1 DIS1.4
N$95
  Top 0.406: R25.1 DIS1.2
N$96
  Top 0.406: R26.1 DIS1.1
N$97
  Top 0.406: R27.1 65.09,18.73 63.82,20 DIS1.9
N$98
  Top 0.406: R28.1 62.55,18.73 61.28,20 DIS1.10
N$99  (via drill 0.5)
  Top 0.406: IC4.15 v81.6,8.26 | v79.06,13.97 80.14,13.97 R30.2
  Bottom 0.406: v81.6,8.26 81.6,13.65 81.28,13.97 v79.06,13.97
N$100
  Top 0.406: IC4.1 R31.2
N$101
  Top 0.406: IC4.2 R32.2
N$102  (via drill 0.5)
  Top 0.406: IC4.3 v80.33,12.7 | v76.52,13.34 R33.2
  Bottom 0.406: v80.33,12.7 77.15,12.7 v76.52,13.34
N$103
  Top 0.406: IC4.4 79.06,8.57 78.74,8.26 73.66,8.26 73.02,8.89 73.02,13.21 R34.2
N$104
  Top 0.406: IC4.5 R35.2
N$105
  Top 0.406: IC4.6 76.52,12.07 75.25,13.34 R36.2
N$106  (via drill 0.5)
  Top 0.406: IC4.7 v75.25,9.21 | v80.33,9.21 83.5,9.21 84.14,9.84 R37.2
  Bottom 0.406: v75.25,9.21 v80.33,9.21
N$107
  Top 0.406: R30.1 80.33,18.73 81.6,20 DIS2.7
N$108
  Top 0.406: R31.1 82.87,18.73 84.14,20 DIS2.6
N$109
  Top 0.406: R32.1 DIS2.4
N$110
  Top 0.406: R33.1 DIS2.2
N$111
  Top 0.406: R34.1 DIS2.1
N$112
  Top 0.406: R35.1 77.79,18.73 76.52,20 DIS2.9
N$113
  Top 0.406: R36.1 75.25,18.73 73.98,20 DIS2.10
N$114
  Top 0.406: R38.1 93.03,18.73 94.3,20 DIS3.7
N$115
  Top 0.406: R39.1 95.57,18.73 96.84,20 DIS3.6
N$116
  Top 0.406: R40.1 DIS3.4
N$117
  Top 0.406: R41.1 DIS3.2
N$118
  Top 0.406: R42.1 DIS3.1
N$119
  Top 0.406: R43.1 90.49,18.73 89.22,20 DIS3.9
N$120
  Top 0.406: R44.1 87.95,18.73 86.68,20 DIS3.10
N$121  (via drill 0.5)
  Top 0.406: IC5.15 v94.3,8.26 | v91.76,13.97 92.84,13.97 R38.2
  Bottom 0.406: v94.3,8.26 94.3,13.65 93.98,13.97 v91.76,13.97
N$122
  Top 0.406: IC5.1 R39.2
N$123
  Top 0.406: IC5.2 R40.2
N$124  (via drill 0.5)
  Top 0.406: IC5.3 v93.03,12.7 | v89.22,13.34 R41.2
  Bottom 0.406: v93.03,12.7 89.85,12.7 v89.22,13.34
N$125
  Top 0.406: IC5.4 91.76,8.57 91.44,8.26 86.36,8.26 85.72,8.89 85.72,13.21 R42.2
N$126
  Top 0.406: IC5.5 R43.2
N$127
  Top 0.406: IC5.6 89.22,12.07 87.95,13.34 R44.2
N$128  (via drill 0.5)
  Top 0.406: IC5.7 v87.95,9.21 | v93.03,9.21 96.2,9.21 96.84,9.84 R45.2
  Bottom 0.406: v87.95,9.21 v93.03,9.21
N$129  (via drill 0.5)
  Top 0.406: IC6.15 v112.08,8.26 | v109.54,13.97 110.62,13.97 R46.2
  Bottom 0.406: v112.08,8.26 112.08,13.65 111.76,13.97 v109.54,13.97
N$130
  Top 0.406: IC6.1 R47.2
N$131
  Top 0.406: IC6.2 R48.2
N$132  (via drill 0.5)
  Top 0.406: IC6.3 v110.81,12.7 | v107,13.34 R49.2
  Bottom 0.406: v110.81,12.7 107.63,12.7 v107,13.34
N$133
  Top 0.406: IC6.4 109.54,8.57 109.22,8.26 104.14,8.26 103.51,8.89 103.51,13.21 R50.2
N$134
  Top 0.406: IC6.5 R51.2
N$135
  Top 0.406: IC6.6 107,12.07 105.73,13.34 R52.2
N$136  (via drill 0.5)
  Top 0.406: IC6.7 v105.73,9.21 | v110.81,9.21 113.98,9.21 114.62,9.84 R53.2
  Bottom 0.406: v105.73,9.21 v110.81,9.21
N$137
  Top 0.406: R46.1 110.81,18.73 112.08,20 DIS4.7
N$138
  Top 0.406: R47.1 113.35,18.73 114.62,20 DIS4.6
N$139
  Top 0.406: R48.1 DIS4.4
N$140
  Top 0.406: R49.1 DIS4.2
N$141
  Top 0.406: R50.1 DIS4.1
N$142
  Top 0.406: R51.1 108.27,18.73 107,20 DIS4.9
N$143
  Top 0.406: R52.1 105.73,18.73 104.46,20 DIS4.10
N$144  (via drill 0.5)
  Top 0.406: IC7.15 v124.78,8.26 | v122.24,13.97 123.32,13.97 R54.2
  Bottom 0.406: v124.78,8.26 124.78,13.65 124.46,13.97 v122.24,13.97
N$145
  Top 0.406: IC7.1 R55.2
N$146
  Top 0.406: IC7.2 R56.2
N$147  (via drill 0.5)
  Top 0.406: IC7.3 v123.51,12.7 | v119.7,13.34 R57.2
  Bottom 0.406: v123.51,12.7 120.33,12.7 v119.7,13.34
N$148
  Top 0.406: IC7.4 122.24,8.57 121.92,8.26 116.84,8.26 116.21,8.89 116.21,13.21 R58.2
N$149
  Top 0.406: IC7.5 R59.2
N$150
  Top 0.406: IC7.6 119.7,12.07 118.43,13.34 R60.2
N$151  (via drill 0.5)
  Top 0.406: IC7.7 v118.43,9.21 | v123.51,9.21 126.68,9.21 127.32,9.84 R61.2
  Bottom 0.406: v118.43,9.21 v123.51,9.21
N$152
  Top 0.406: R54.1 123.51,18.73 124.78,20 DIS5.7
N$153
  Top 0.406: R55.1 126.05,18.73 127.32,20 DIS5.6
N$154
  Top 0.406: R56.1 DIS5.4
N$155
  Top 0.406: R57.1 DIS5.2
N$156
  Top 0.406: R58.1 DIS5.1
N$157
  Top 0.406: R59.1 120.97,18.73 119.7,20 DIS5.9
N$158
  Top 0.406: R60.1 118.43,18.73 117.16,20 DIS5.10
N$159  (via drill 0.5)
  Top 0.406: IC8.15 v137.79,8.26 | v135.26,13.97 136.33,13.97 R62.2
  Bottom 0.406: v137.79,8.26 137.79,13.65 137.48,13.97 v135.26,13.97
N$160
  Top 0.406: IC8.1 R63.2
N$161
  Top 0.406: IC8.2 R64.2
N$162  (via drill 0.5)
  Top 0.406: IC8.3 v136.53,12.7 | v132.72,13.34 R65.2
  Bottom 0.406: v136.53,12.7 133.35,12.7 v132.72,13.34
N$163
  Top 0.406: IC8.4 135.26,8.57 134.94,8.26 129.86,8.26 129.22,8.89 129.22,13.21 R66.2
N$164
  Top 0.406: IC8.5 R67.2
N$165
  Top 0.406: IC8.6 132.72,12.07 131.44,13.34 R68.2
N$166  (via drill 0.5)
  Top 0.406: IC8.7 v131.44,9.21 | v136.53,9.21 139.7,9.21 140.34,9.84 R69.2
  Bottom 0.406: v131.44,9.21 v136.53,9.21
N$167
  Top 0.406: R62.1 136.53,18.73 137.79,20 DIS6.7
N$168
  Top 0.406: R63.1 139.07,18.73 140.34,20 DIS6.6
N$169
  Top 0.406: R64.1 DIS6.4
N$170
  Top 0.406: R65.1 DIS6.2
N$171
  Top 0.406: R66.1 DIS6.1
N$172
  Top 0.406: R67.1 133.98,18.73 132.72,20 DIS6.9
N$173
  Top 0.406: R68.1 131.44,18.73 130.17,20 DIS6.10
N$174  (via drill 0.5)
  Top 0.406: v96.2,48.58 96.2,48.26 92.71,44.77 92.71,35.88 91.76,34.92 73.34,34.92 72.71,34.29 72.71,13.97 72.07,13.34 72.07,8.26 73.02,7.3 73.02,3.49 72.71,3.18 67.94,3.18 67.63,3.49 IC3.14
  Bottom 0.406: IC2.9 v96.2,48.58
N$175
  Top 0.406: R29.1 DIS1.5
N$176
  Top 0.406: R37.1 DIS2.5
N$177
  Top 0.406: R45.1 DIS3.5
N$178
  Top 0.406: R53.1 DIS4.5
N$179
  Top 0.406: R61.1 DIS5.5
N$180
  Top 0.406: R69.1 DIS6.5
N$181  (via drill 0.5)
  Top 0.406: IC4.14 v80.33,2.22 | v61.28,2.22 IC3.9
  Bottom 0.406: v61.28,2.22 73.34,2.22 73.66,2.54 74.3,2.54 74.61,2.22 v80.33,2.22
N$182  (via drill 0.5)
  Top 0.406: IC4.9 v73.98,1.59 | IC5.14 v93.03,1.59
  Bottom 0.406: v73.98,1.59 74.3,1.27 92.71,1.27 v93.03,1.59
N$183  (via drill 0.5)
  Top 0.406: v110.81,2.22 IC6.14 | IC5.9 v86.68,2.22
  Bottom 0.406: v86.68,2.22 92.39,2.22 92.71,2.54 93.35,2.54 93.66,2.22 103.82,2.22 104.14,2.54 104.77,2.54 105.09,2.22 v110.81,2.22
N$184  (via drill 0.5)
  Top 0.406: IC6.9 v104.46,1.59 | v123.51,1.59 IC7.14
  Bottom 0.406: v104.46,1.59 104.77,1.27 123.19,1.27 v123.51,1.59
N$185  (via drill 0.5)
  Top 0.406: IC7.9 v117.16,2.22 | v136.53,2.22 IC8.14
  Bottom 0.406: v117.16,2.22 122.87,2.22 123.19,2.54 123.82,2.54 124.14,2.22 v136.53,2.22
SCK  (via drill 0.5)
  Top 0.406: IC8.11 v132.72,7.3 | v63.82,7.3 IC3.11 | IC4.11 v76.52,7.3 | IC5.11 v89.22,7.3 | IC6.11 v107,7.3 | IC7.11 v119.7,7.3 | U$1.P$3 143.19,53.66 102.24,53.66 101.28,52.7 99.69,52.7 v98.74,51.75 98.74,49.85 93.35,44.45 93.35,35.56 94.3,34.61 98.11,34.61 98.74,33.97 98.74,7.62 v98.43,7.3
  Bottom 0.406: IC2.11 v98.74,51.75 | v63.82,7.3 69.53,7.3 69.85,7.62 70.49,7.62 70.8,7.3 74.61,7.3 74.93,7.62 75.57,7.62 75.88,7.3 v76.52,7.3 82.23,7.3 82.55,7.62 83.19,7.62 83.5,7.3 87.31,7.3 87.63,7.62 88.27,7.62 88.58,7.3 v89.22,7.3 94.93,7.3 95.25,7.62 95.88,7.62 96.2,7.3 v98.43,7.3 105.09,7.3 105.41,7.62 106.05,7.62 106.36,7.3 v107,7.3 112.71,7.3 113.03,7.62 113.66,7.62 113.98,7.3 117.79,7.3 118.11,7.62 118.74,7.62 119.06,7.3 v119.7,7.3 125.41,7.3 125.73,7.62 126.36,7.62 126.68,7.3 130.81,7.3 131.13,7.62 131.76,7.62 132.08,7.3 v132.72,7.3
SCL  (via drill 0.5)
  Top 0.406: v101.28,61.28 100.65,60.64 v93.66,60.64 | v68.26,60.64 68.19,60.58 58.35,60.58 57.22,59.44 v57.22,55.18
  Bottom 0.406: v101.28,61.28 101.99,60.58 U$33.26 128.97,60.58 132.78,56.76 136.14,56.76 139.95,60.58 U$36.26 142.31,60.58 142.88,60.01 142.88,59.05 141.6,57.79 141.6,55.56 | U$1.P$19 141.6,36.19 141.6,55.56 | R8.1 141.6,55.56 | U$30.26 68.19,60.58 v68.26,60.64 v93.66,60.64 | U$51.26 v57.22,55.18 v57.15,55.24
SDA  (via drill 0.5)
  Top 0.406: v101.28,60.01 94.3,60.01 93.98,59.69 v93.03,59.69 | v67.63,59.69 67.39,59.92 58.65,59.92 57.79,59.05 57.79,55.88 58.1,55.56 v58.1,54.61
  Bottom 0.406: v101.28,60.01 101.36,59.92 U$33.27 128.67,59.92 132.48,56.12 136.44,56.12 136.53,56.2 | U$36.27 140.25,59.92 136.53,56.2 | 140.02,53.17 140.02,35.88 143.19,32.7 145.1,32.7 U$1.P$20 | 140.02,53.17 140.34,53.49 R7.1 | U$51.27 57.87,54.37 v58.1,54.61 | U$30.27 67.39,59.92 v67.63,59.69 68.58,59.69 68.9,60.01 92.71,60.01 v93.03,59.69 | 140.02,53.17 139.55,53.17 136.53,56.2
~RESET  (via drill 0.5)
  Top 0.406: v101.28,62.55 100.33,61.59 v94.3,61.59 | v56.2,55.88 56.51,57.47 56.51,59.69 58.05,61.23 67.57,61.23 67.94,61.59 v68.9,61.59
  Bottom 0.406: v101.28,62.55 102.6,61.23 U$33.25 129.28,61.23 133.09,57.41 135.84,57.41 139.65,61.23 U$36.25 143.25,61.23 143.83,60.64 U$1.P$1 | v94.3,61.59 93.35,61.59 93.03,61.28 69.21,61.28 v68.9,61.59 67.94,61.59 67.57,61.23 U$30.25 | v56.2,55.88 56.2,54.93 56.57,54.56 U$51.25